# EAGLE board milled PCB (EAGLE 7.5.0)
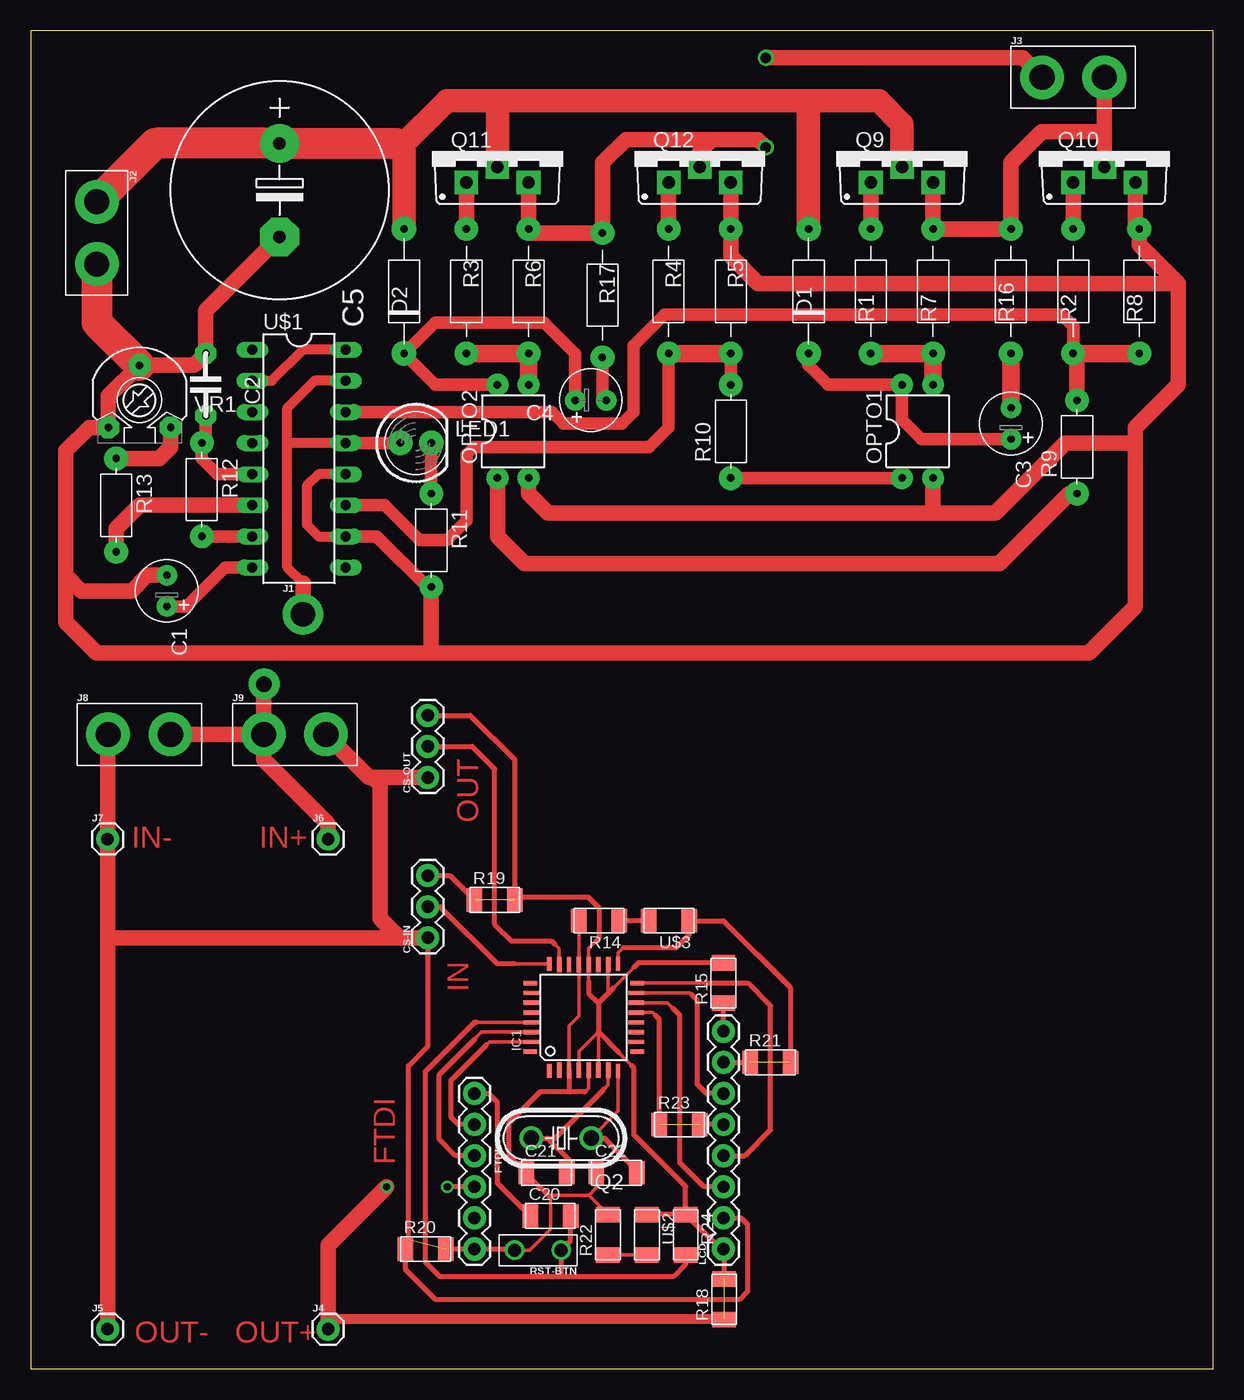
[diagram p0: board, top side]
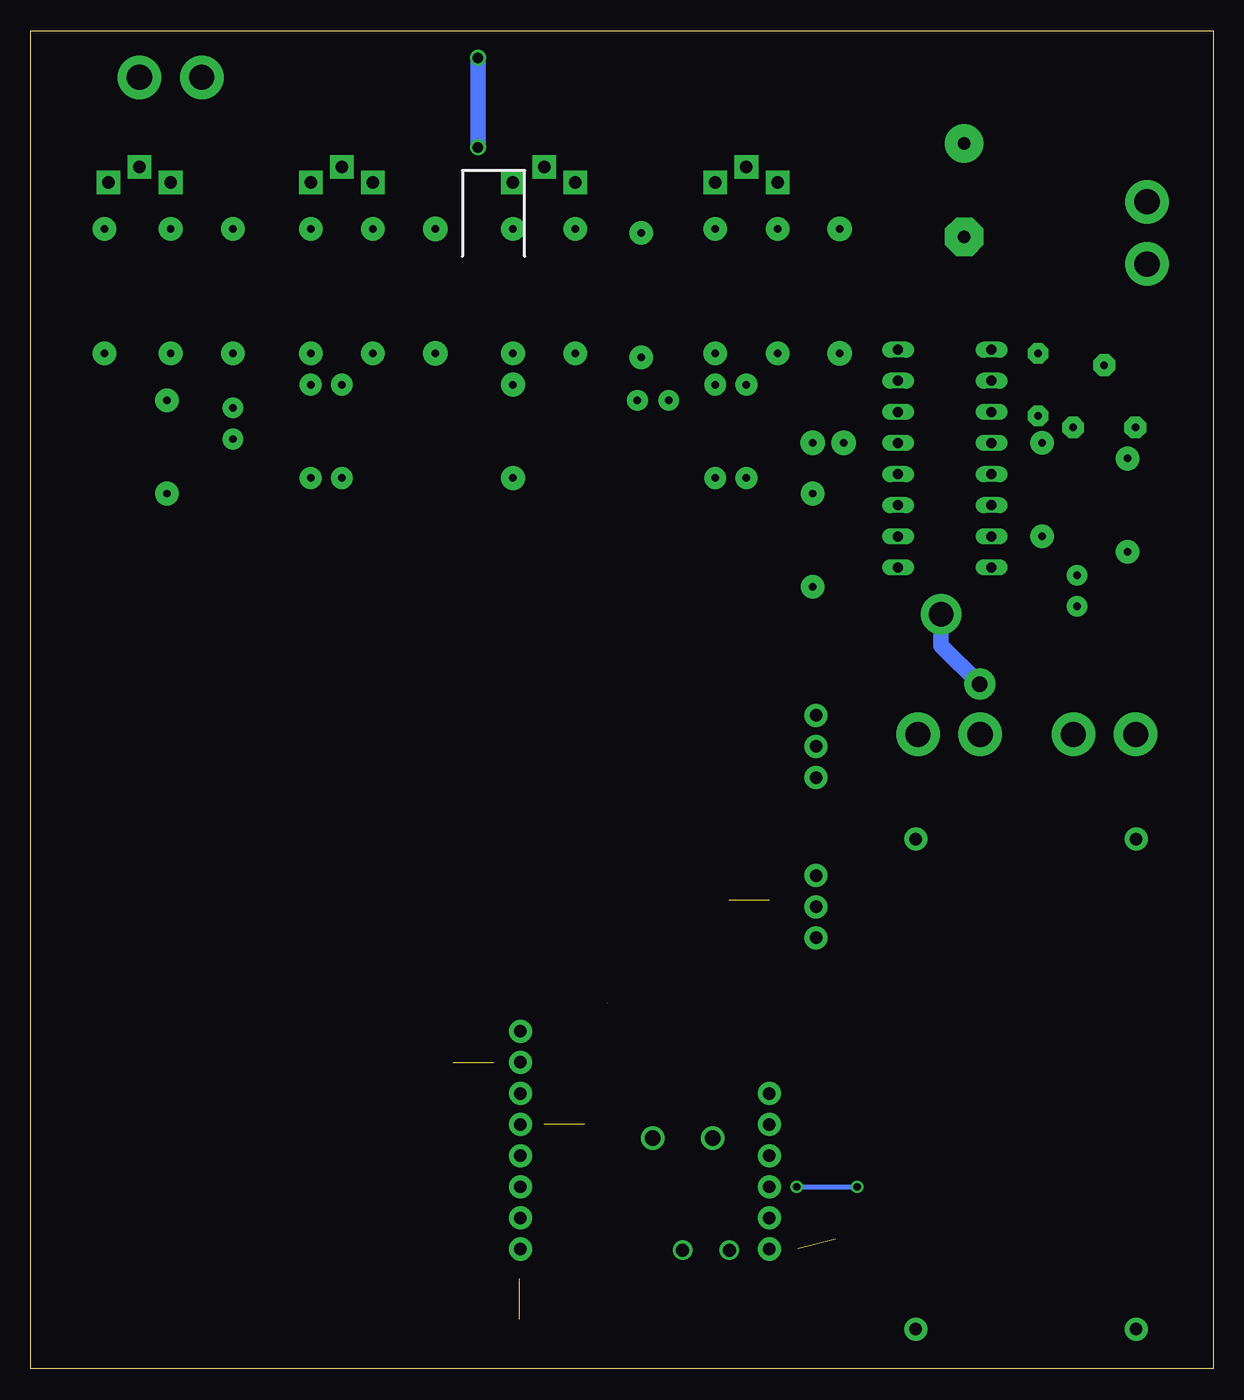
[diagram p1: board, bottom side, seen from below]

Size 96.52 x 109.22 mm. Coordinates in mm from the lower left corner, seen from the top.
Outline: 0,0 96.52,0 96.52,109.22 0,109.22 0,0
Copper layers (1*16): Top 0.035mm / dielectric 1.5mm / Bottom 0.035mm
Design rules "default": minimum track width 10mil, minimum drill 24mil, track to track 8mil, track to pad 8mil, pad to pad 8mil, via to via 8mil, smd to smd 8mil, copper to edge 40mil, drill to drill 8mil, minimum pad ring 10mil, minimum via ring 8mil, stop-mask expansion 4mil, vias tented up to drill 0mil, thermal gap 10mil

## Footprints (pad centres in the part's own frame; a part is rotated, then mirrored left to right if it is on the bottom)
CAP-2,5 = drill 0.61 pad 1.676: + 1.27,0; - -1.27,0
CAP-NP5 = drill 0.61 pad 1.676 octagon: 1 -3.81,0; 2 1.27,0
E7,5-18 = drill 1.016 pad 3.15: + -3.81,0 | drill 1.016 pad 3.15 octagon: - 3.81,0
C1206FAB = smd 1.27 x 1.905: 1 -1.651,0; 2 1.651,0
1X03 = drill 1.016 pad 1.88: 1 0,0; 2 2.54,0; 3 5.08,0
1N4007 = drill 0.61 pad 2: A 5.08,0; K -5.08,0
FTDI_BASIC = drill 1.016 pad 1.88: CTS 10.16,0; DTR 0,0; GND 12.7,0; RXI 2.54,0; TXO 5.08,0; VCC 7.62,0
TQFP32-08THIN = smd 1.118 x 0.356: 1 -4.369,2.8; 8 -4.369,-2.8; 17 4.369,-2.8; 24 4.369,2.8 | smd 1.27 x 0.356: 2 -4.293,2; 3 -4.293,1.2; 4 -4.293,0.4; 5 -4.293,-0.4; 6 -4.293,-1.2; 7 -4.293,-2; 18 4.293,-2; 19 4.293,-1.2; 20 4.293,-0.4; 21 4.293,0.4; 22 4.293,1.2; 23 4.293,2 | smd 0.356 x 1.118: 9 -2.8,-4.369; 16 2.8,-4.369; 25 2.8,4.369; 32 -2.8,4.369 | smd 0.356 x 1.27: 10 -2,-4.293; 14 1.2,-4.293; 15 2,-4.293; 26 2,4.293; 27 1.2,4.293; 31 -2,4.293 | smd 0.35 x 1.27: 11 -1.2,-4.293; 12 -0.4,-4.293; 13 0.4,-4.293; 28 0.4,4.293; 29 -0.4,4.293; 30 -1.2,4.293
1X01_2MM = drill 2 pad 3.302: 1 0,0
1X02_XTRA_BIG = drill 2.057 pad 3.556: 1 -2.54,0; 2 2.54,0
1X01 = drill 1.016 pad 1.88: 1 0,0
1X08 = drill 1.016 pad 1.88: 1 0,0; 2 2.54,0; 3 5.08,0; 4 7.62,0; 5 10.16,0; 6 12.7,0; 7 15.24,0; 8 17.78,0
LED5 = drill 0.61 pad 2: A -1.27,0; K 1.27,0
DIL-04 = drill 0.61 pad 1.778: 1 -1.27,-3.81; 2 1.27,-3.81; 3 1.27,3.81; 4 -1.27,3.81
HC49U-V = drill 0.813: 1 -2.413,0; 2 2.413,0
TO220BV = drill 1.016 pad 1.93 square: D 0,-1.27; G -2.54,-2.54; S 2.54,-2.54
R-7,5 = drill 0.61 pad 1.93: 1 -5.08,0; 2 5.08,0
R-7,5' = drill 0.61 pad 1.93: 1 -3.81,0; 2 3.81,0
R1206FAB = smd 1.27 x 1.905: 1 -1.651,0; 2 1.651,0
1X02_BIG = drill 1.067: P$1 0,0; P$2 3.81,0
DIL16 = drill 0.813 long: 1 -8.89,-3.81; 2 -6.35,-3.81; 3 -3.81,-3.81; 4 -1.27,-3.81; 5 1.27,-3.81; 6 3.81,-3.81; 7 6.35,-3.81; 8 8.89,-3.81; 9 8.89,3.81; 10 6.35,3.81; 11 3.81,3.81; 12 1.27,3.81; 13 -1.27,3.81; 14 -3.81,3.81; 15 -6.35,3.81; 16 -8.89,3.81
LED1206FAB = smd 1.27 x 1.905: 1 -1.651,0; 2 1.651,0
VR-5 = drill 0.61 pad 1.778 octagon: 1 -2.54,-2.54; 2 0,2.54; 3 2.54,-2.54

## Placement (x,y rotation side)
C1  10UF  [CAP-2,5]  11.11,63.5 270 top
C2  100NF  [CAP-NP5]  14.29,79.06 270 top
C3  47UF  [CAP-2,5]  80.01,77.15 270 top
C4  47UF  [CAP-2,5]  45.72,79.06 180 top
C5  3300UF/25V  [E7,5-18]  20.32,96.2 270 top
C20  0.1uF  [C1206FAB]  42.42,12.48 0 top
C21  22pF  [C1206FAB]  42.1,16 0 top
C22  22pF  [C1206FAB]  47.82,16 0 top
CS-IN  455-1750-1-ND  [1X03]  32.42,35.18 90 top
CS-OUT  455-1750-1-ND  [1X03]  32.42,48.26 90 top
D1  1N4007/FR107  [1N4007]  63.5,87.95 90 top
D2  1N4007/IRF107  [1N4007]  30.48,87.95 90 top
FTDI  6_PIN_SERIAL_CABLEPTH  [FTDI_BASIC]  36.23,22.48 270 top
IC1  ATMEGA88-THIN  [TQFP32-08THIN]  45.14,28.68 90 top
J1  [1X01_2MM]  22.23,61.59 0 top
J2  [1X02_XTRA_BIG]  5.4,92.71 270 top
J3  [1X02_XTRA_BIG]  85.09,105.41 0 top
J4  [1X01]  24.28,3.24 0 top
J5  [1X01]  6.28,3.24 0 top
J6  [1X01]  24.28,43.24 0 top
J7  [1X01]  6.28,43.24 0 top
J8  [1X02_XTRA_BIG]  8.87,51.78 0 top
J9  [1X02_XTRA_BIG]  21.56,51.78 0 top
LCD  [1X08]  56.55,9.78 90 top
LED1  LED-5  [LED5]  31.43,75.56 0 top
OPTO1  PC817  [DIL-04]  72.39,76.52 0 top
OPTO2  PC817  [DIL-04]  39.37,76.52 0 top
Q2  [HC49U-V]  43.31,18.83 180 top
Q9  IRF3205  [TO220BV]  71.12,99.38 0 top
Q10  IRF3205  [TO220BV]  87.63,99.38 0 top
Q11  IRF3205  [TO220BV]  38.1,99.38 0 top
Q12  IRF3205  [TO220BV]  54.61,99.38 0 top
R1  10R  [R-7,5]  68.58,87.95 90 top
R2  10R  [R-7,5]  85.09,87.95 90 top
R3  10R  [R-7,5]  35.56,87.95 270 top
R4  10R  [R-7,5]  52.07,87.95 270 top
R5  2K  [R-7,5]  57.15,87.95 270 top
R6  2k  [R-7,5]  40.64,87.95 270 top
R7  2K  [R-7,5]  73.66,87.95 90 top
R8  2K  [R-7,5]  90.49,87.95 90 top
R9  2K  [R-7,5']  85.41,75.25 90 top
R10  2K  [R-7,5']  57.15,76.52 90 top
R11  1OK  [R-7,5']  32.7,67.63 270 top
R12  1K  [R-7,5']  13.97,71.75 270 top
R13  140K  [R-7,5']  6.99,70.48 270 top
R14  499  [R1206FAB]  46.39,36.58 180 top
R15  1K  [R1206FAB]  56.55,31.48 90 top
R16  1K  [R-7,5]  80.01,87.95 90 top
R17  1k  [R-7,5]  46.67,87.63 270 top
R18  0  [R1206FAB]  56.61,5.68 90 top
R19  0  [R1206FAB]  37.88,38.26 0 top
R20  0  [R1206FAB]  32.23,9.78 0 top
R21  0  [R1206FAB]  60.39,25.02 0 top
R22  499  [R1206FAB]  47.12,10.95 90 top
R23  0  [R1206FAB]  52.96,19.94 0 top
R24  10k  [R1206FAB]  53.47,10.95 270 top
RST-BTN  [1X02_BIG]  43.31,9.68 180 top
U$1  SG3525N  [DIL16]  21.91,74.3 270 top
U$2  pwr led  [LED1206FAB]  50.29,10.95 270 top
U$3  pwr led  [LED1206FAB]  52.1,36.58 180 top
VR1  10K  [VR-5]  8.89,79.38 0 top

## Library data of the parts
C1-C4 LED1 OPTO1 OPTO2 R9-R13 VR1 = chuong
C5 D1 D2 Q9-Q12 R1-R8 R16 R17 = lbr
C20-C22 IC1 R14 R15 R18-R24 U$2 U$3 = fab
CS-IN CS-OUT = SparkFun-Connectors; PROD_ID: XXX-00000
FTDI J1-J9 RST-BTN = SparkFun-Connectors
LCD = SparkFun-Connectors; PROD_ID: CONN-08438
Q2 = adafruit; OC_FARNELL: 1666969; OC_NEWARK: unknown
U$1 = irs

## Nets
12V: C5.+ D1.A D2.A J2.1 Q9.D Q11.D
12VIN: J6.1 J8.2 J9.1
A0: CS-OUT.2 IC1.23
A1: CS-IN.2 IC1.24
A2: IC1.25
A3: IC1.26
A4: IC1.27
A5: IC1.28
COMP: U$1.9
CSS: C1.+ U$1.8
D0: FTDI.TXO IC1.30
D1: FTDI.RXI IC1.31
D2: IC1.32
D3: IC1.1
D4: IC1.2
D5: IC1.9
D6: IC1.10
D7: IC1.11
D8: IC1.12
D9: IC1.13 LCD.5 R23.1 R23.2
D10: IC1.14 LCD.3
D11: IC1.15 LCD.6
D12: IC1.16 LCD.4
D13: IC1.17 LCD.7 R21.1 R21.2 U$3.1
GND: C1.- C2.1 C5.- J2.2 OPTO1.2 OPTO2.2 Q10.S Q12.S R5.1 R8.2 R11.2 U$1.10 U$1.12 VR1.1 VR1.2
GND1: C21.1 C22.1 CS-IN.1 CS-OUT.1 FTDI.GND IC1.3 IC1.5 IC1.21 J5.1 J7.1 J8.1 J9.2 LCD.2 R14.2 R20.1 R20.2 R22.2 RST-BTN.P$2
IN-: U$1.1
N$1: J3.2 Q9.S Q10.D R7.2 R16.2
N$2: C3.+ D1.K OPTO1.4
N$3: C4.+ D2.K OPTO2.4
N$4: OPTO1.3 R1.1 R7.1
N$5: OPTO2.3 R3.2 R6.2
N$6: OPTO2.1 R9.1
N$7: C21.2 IC1.7 Q2.2
N$8: R13.1 VR1.3
N$9: OPTO1.1 R10.1
N$10: LED1.K R11.1
N$11: C3.- R16.1
N$12: R12.2 U$1.7
N$13: C4.- R17.2
N$14: C22.2 IC1.8 Q2.1
N$15: R22.1 U$2.2
N$16: R13.2 U$1.6
N$17: J3.1 Q11.S Q12.D R6.1 R17.1
N$18: C20.1 FTDI.DTR
N$19: Q9.G R1.2
N$20: Q10.G R2.2
N$21: Q11.G R3.1
N$22: Q12.G R4.1
N$23: U$1.3
N$24: U$1.4
N$25: C2.2 R12.1 U$1.5
N$26: R14.1 U$3.2
N$31: LCD.8 R15.1
OUTA: R4.2 R5.2 R10.2 U$1.11
OUTB: R2.1 R8.1 R9.2 U$1.14
RST: C20.2 IC1.29 R24.2 RST-BTN.P$1
VCC: J1.1 LED1.A U$1.13 U$1.15
VCC1: CS-IN.3 CS-OUT.3 FTDI.VCC IC1.4 IC1.6 IC1.18 IC1.20 J4.1 LCD.1 R15.2 R18.1 R18.2 R19.1 R19.2 R24.1 U$2.1
VREF: U$1.2 U$1.16

## Tracks (layer width: path | path; a pad name or v marks a point on that pad's centre or on a via)
12V
  Top 1.905: 38.1,103.5 33.97,103.5 30.16,99.69 | 38.1,103.5 63.5,103.5 | 63.5,103.5 69.22,103.5 71.12,101.6 Q9.D | D2.A 30.48,99.38 30.16,99.69 | 30.16,99.69 29.84,100.01 | Q11.D 38.1,103.5 | D1.A 63.5,103.5
  Top 2.54: 29.84,100.01 C5.+ 10.16,100.01 J2.1
12VIN  (via drill 1.27 pad 2.54)
  Top 1.27: J9.1 19.02,49.75 24.28,44.49 J6.1 | J9.1 19.02,55.85 v19.05,55.88 | J9.1 J8.2
A0
  Top 0.305: IC1.23 43.14,34.3 42.77,34.67
  Top 0.406: 42.77,34.67 42.51,34.92 39.24,34.92 37.88,36.29 37.88,48.96 36.04,50.8 CS-OUT.2
A1
  Top 0.305: IC1.24 39.53,33.05
  Top 0.406: CS-IN.2 33.43,37.72 38.1,33.05 39.53,33.05
CSS
  Top 1.016: U$1.8 15.88,65.41 12.7,62.23 C1.+
D0
  Top 0.305: IC1.30 36.82,27.48 35.91,26.57
  Top 0.406: 36.26,26.92 35.91,26.57 33.34,24 33.34,18.76 34.7,17.4 FTDI.TXO
D1
  Top 0.305: IC1.31 37.45,26.68 37.21,26.45
  Top 0.406: FTDI.RXI 34.89,19.94 34.32,20.51 34.32,23.56 37.21,26.45
D9  (1 unrouted)
  Top 0.305: IC1.13 50.77,29.08 50.99,28.86
  Top 0.406: LCD.5 R23.2 | R23.1 51.31,28.54 50.99,28.86
D10  (1 unrouted)
  Top 0.305: IC1.14 51.98,29.88 52.42,29.43 52.58,29.27
  Top 0.406: LCD.3 54.96,14.86 52.99,16.83 52.99,28.86 52.42,29.43
D11
  Top 0.305: IC1.15 53.8,30.68 53.96,30.53 54.32,30.16
  Top 0.406: LCD.6 55.15,22.48 54.42,23.21 54.42,30.07 53.96,30.53
D12
  Top 0.305: IC1.16 55.04,31.48
  Top 0.406: LCD.4 58.29,17.4 60.39,19.49 60.39,29.62 58.53,31.48 55.04,31.48
D13  (1 unrouted)
  Top 0.305: IC1.17 47.94,33.94 48.39,34.38
  Top 0.406: LCD.7 R21.1 | 48.39,34.38 52.7,34.38 53.75,35.43 U$3.1 56.55,36.58 62.04,31.08 R21.2
GND
  Top 0.813: U$1.12 23.5,73.03 22.54,72.07 22.54,68.9 23.5,67.94 U$1.10
  Top 1.016: U$1.10 28.26,67.94 32.38,63.82 R11.2
  Top 1.27: C5.- 14.29,86.36 C2.1 13.34,81.92 VR1.2 6.35,79.38 VR1.1 4.76,76.83 2.86,74.93 2.86,64.77 | 2.86,64.77 4.13,63.5 8.26,63.5 9.53,64.77 C1.- | R11.2 32.7,58.42 | 32.7,58.42 5.4,58.42 2.86,60.96 2.86,64.77 | OPTO2.2 40.64,71.44 42.23,69.85 73.66,69.85 | 73.66,69.85 OPTO1.2 | 32.7,58.42 86.36,58.42 90.17,62.23 90.17,75.56 | 90.17,75.56 90.17,76.83 93.66,80.33 93.66,88.58 | 90.17,75.56 84.45,75.56 78.74,69.85 73.66,69.85 | Q10.S 90.17,93.34 R8.2 90.49,91.76 93.66,88.58 | Q12.S R5.1 57.15,90.81 59.37,88.58 93.66,88.58
  Top 2.54: J2.2 5.4,85.41 VR1.2
GND1  (1 unrouted)
  Top 0.305: 42.42,14 42.42,11.4 40.7,9.68 RST-BTN.P$2 | IC1.5 45.54,22.91 45.28,22.64 | IC1.3 43.94,28 44.74,28.8 IC1.21 44.74,36.44 R14.2 | 42.51,14.16 45.56,14.16 | 45.56,14.16 R22.2 | C22.1 46.16,14.76 45.56,14.16
  Top 0.406: 44.01,22.59 45.23,22.59 45.28,22.64 | 44.01,22.59 41.58,22.59 39.02,20.03 39.02,17.43 C21.1 40.77,15.65 42.42,14 42.42,14.06 42.51,14.16 | IC1.3 43.94,22.65 44.01,22.59 | RST-BTN.P$2 39.4,9.78 FTDI.GND R20.2 | LCD.2 57.98,12.32 58.52,11.78 58.52,6.32 57.85,5.65 33.05,5.65 30.57,8.13 R20.1 30.57,10.32 30.83,10.57 30.83,24.73 32.42,26.32 CS-IN.1
  Top 1.27: J8.1 6.28,51.74 J7.1 6.28,35.56 | J5.1 6.28,35.56 | 30.1,35.18 28.51,36.77 28.51,47.69 27.94,48.26 | 30.1,35.18 6.66,35.18 6.28,35.56 | CS-IN.1 30.1,35.18 | CS-OUT.1 27.94,48.26 | 27.94,48.26 27.62,48.26 J9.2
N$1
  Top 1.27: Q9.S R7.2 R16.2 80.01,98.42 82.55,100.97 87.63,100.97 | Q10.D 87.63,100.97 | J3.2 87.63,100.97
N$2
  Top 1.016: D1.K 63.5,81.92 65.09,80.33 OPTO1.4 71.12,77.47 72.71,75.88 C3.+
N$3
  Top 1.016: OPTO2.4 33.02,80.33 D2.K 33.02,85.41 41.91,85.41 44.45,82.87 C4.+
N$4
  Top 1.422: R1.1 R7.1 OPTO1.3
N$5
  Top 1.422: R3.2 R6.2 OPTO2.3
N$6
  Top 1.27: R9.1 84.77,71.44 79.06,65.72 40.32,65.72 38.1,67.94 OPTO2.1
N$7
  Top 0.305: IC1.7 47.14,23.17 46.78,22.81 46.42,22.45
  Top 0.406: C21.2 44.07,16.92 42.16,18.83 Q2.2 42.8,18.83 46.78,22.81
N$8
  Top 1.27: VR1.3 11.43,75.25 10.48,74.3 R13.1
N$9
  Top 1.016: R10.1 OPTO1.1
N$10
  Top 1.016: LED1.K R11.1
N$11
  Top 1.422: R16.1 C3.-
N$12
  Top 1.016: R12.2 U$1.7
N$13
  Top 1.016: R17.2 46.67,79.38 C4.-
N$14
  Top 0.305: IC1.8 47.94,21.05 Q2.1
  Top 0.406: C22.2 49.47,16.19 46.83,18.83 Q2.1
N$15
  Top 0.305: R22.1 U$2.2
N$16
  Top 1.27: U$1.6 8.89,70.48 6.99,68.58 R13.2
N$17  (via drill 0.86)
  Top 1.27: Q11.S R6.1 40.96,92.71 R17.1 46.67,98.42 48.58,100.33 55.56,100.33 | 55.56,100.33 54.61,99.38 Q12.D | 55.56,100.33 59.37,100.33 v60.01,99.69 | v60.01,107 80.96,107 J3.1
  Bottom 1.27: v60.01,99.69 v60.01,107
N$18
  Top 0.406: FTDI.DTR 37.37,22.48 38.1,21.75 38.1,15.14 C20.1
N$19
  Top 1.27: R1.2 Q9.G
N$20
  Top 1.27: R2.2 Q10.G
N$21
  Top 1.27: R3.1 Q11.G
N$22
  Top 1.27: R4.1 Q12.G
N$25
  Top 1.016: C2.2 14.29,75.88 R12.1 13.97,74.3 15.24,73.03 U$1.5
N$26
  Top 0.406: U$3.2 R14.1
N$27  (via drill 1.27)
  other vias: 40.86,18.83
N$28  (via drill 1.27)
  other vias: 45.75,18.83
N$29  (via drill 1.78)
  other vias: 11.4,51.69
N$30  (via drill 1.78)
  other vias: 6.32,51.75
N$31
  Top 0.406: LCD.8 R15.1
OUTA
  Top 1.016: R5.2 R10.2 | R4.2 52.07,76.83 50.48,75.25 36.2,75.25 35.56,74.61 35.56,69.22 33.97,67.63 31.75,67.63 28.89,70.48 U$1.11
  Top 1.422: R4.2 R5.2
OUTB
  Top 1.016: 86.04,82.87 R2.1 85.09,85.09 84.14,86.04 51.75,86.04 49.21,83.5 49.21,78.11 48.26,77.15 43.5,77.15 42.55,78.11 U$1.14
  Top 1.27: R9.2 85.41,82.55 R2.1
  Top 1.422: R2.1 R8.1
RST
  Top 0.305: 44.04,12.45 C20.2 | IC1.29 36.41,28.28
  Top 0.406: R24.2 53.47,8.54 52.45,7.53 43.27,7.53 | 43.27,7.53 33.4,7.53 32.19,8.73 32.19,24.26 36.22,28.28 36.41,28.28 | 44.04,12.45 44.04,10.41 RST-BTN.P$1 43.31,7.56 43.27,7.53
VCC
  Top 0.813: 22.23,64.14 20.95,65.41 20.95,75.56 | 20.95,75.56 20.95,78.42 23.18,80.64 U$1.15 | U$1.13 20.95,75.56
  Top 1.016: U$1.13 LED1.A
  Top 1.27: 22.23,64.14 J1.1
  Bottom 1.27: J1.1 22.23,59.05 19.05,55.88
VCC1  (via drill 0.6)  (2 unrouted)
  Top 0.254: IC1.4
  Top 0.305: 45.54,31.59 IC1.20 45.54,34.3 46.13,34.89 | 46.95,26.86 47.99,25.83 49.05,24.77 | 49.24,32.77 47.56,31.08 | IC1.18 47.14,30.66 46.94,30.46 | IC1.6 46.34,27.48 46.33,27.49 44.74,25.9 IC1.4
  Top 0.406: R24.1 56.29,9.78 LCD.1 56.61,9.72 R18.2 | 46.33,29.85 46.94,30.46 47.56,31.08 | 45.54,31.59 45.54,30.64 46.33,29.85 | 46.33,29.85 46.33,27.49 47.99,25.83 | FTDI.VCC v34,14.86 | 46.13,34.89 46.39,35.15 46.39,37.62 45.5,38.51 39.97,38.51 39.72,38.26 R19.2 39.53,49.69 35.88,53.34 CS-OUT.3 | R15.2 49.61,33.13 49.24,32.77 | R24.1 U$2.1 | 49.05,24.77 49.24,24.57 49.24,19.11 53.47,14.89 R24.1 | CS-IN.3 34.23,40.26 R19.1
  Top 0.813: R18.1 25.07,4.03 J4.1
  Top 1.27: J4.1 24.28,10.09 v29.05,14.86
  Bottom 0.406: v34,14.86 v29.05,14.86
VREF
  Top 0.813: U$1.16 22.23,83.19 19.68,80.64 U$1.2

## Text on the board
Top: OUT | IN- | IN+ | IN | FTDI | OUT- | OUT+